# Altium PCB СФ МЭИ ЛБ ПЭ2-18 11.03.04 03.PcbDoc
Units mm, origin at the board's own origin, x right, y up, seen from the top; angles counter-clockwise.
Board outline 36.78 x 15.7 mm, 2 copper layers (Top Layer, Bottom Layer); 13 components, 7 nets, 31 pads, 2 vias.
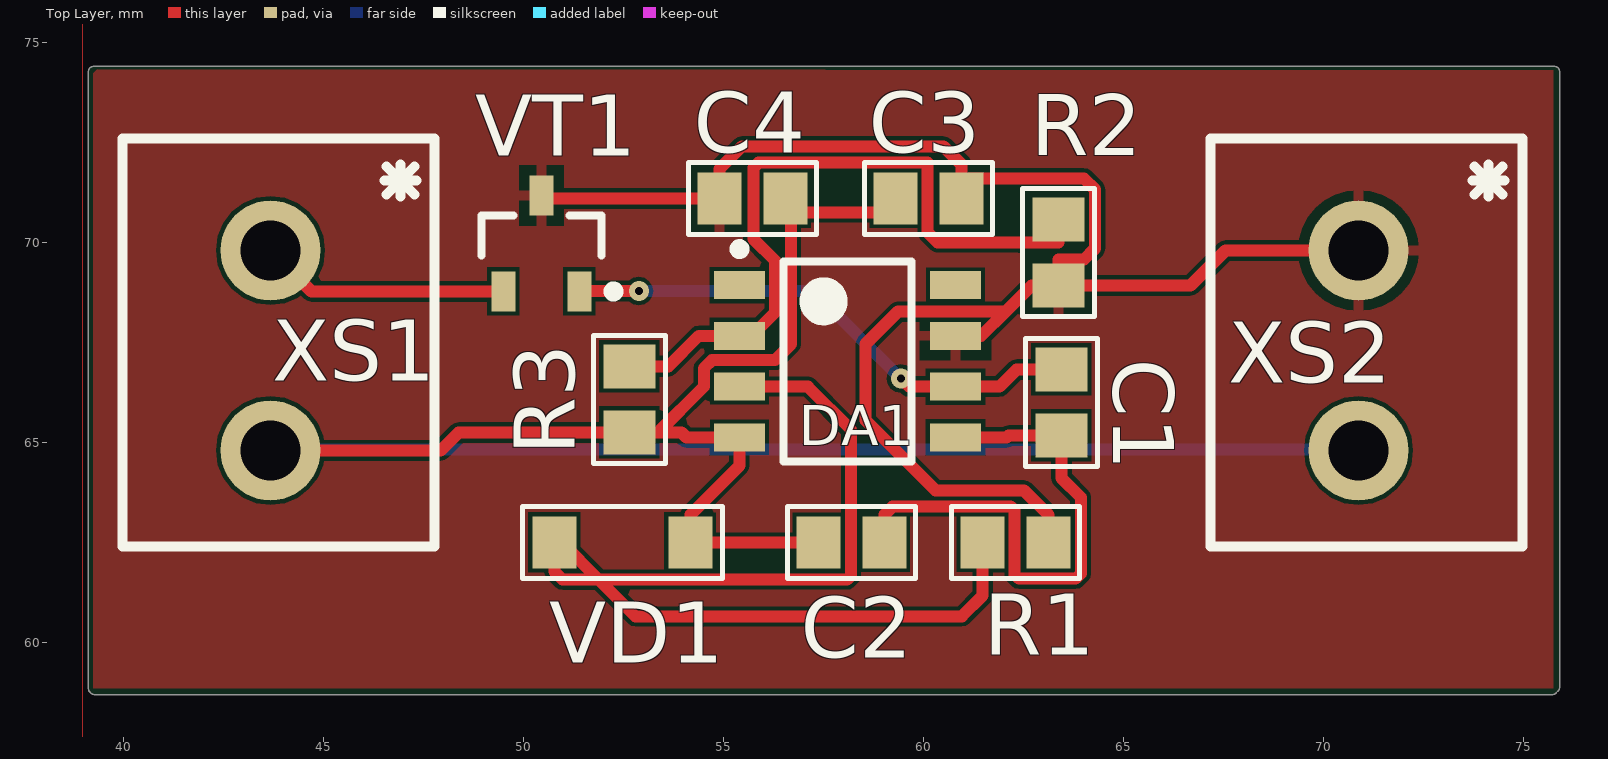
[diagram p0: Top Layer view]
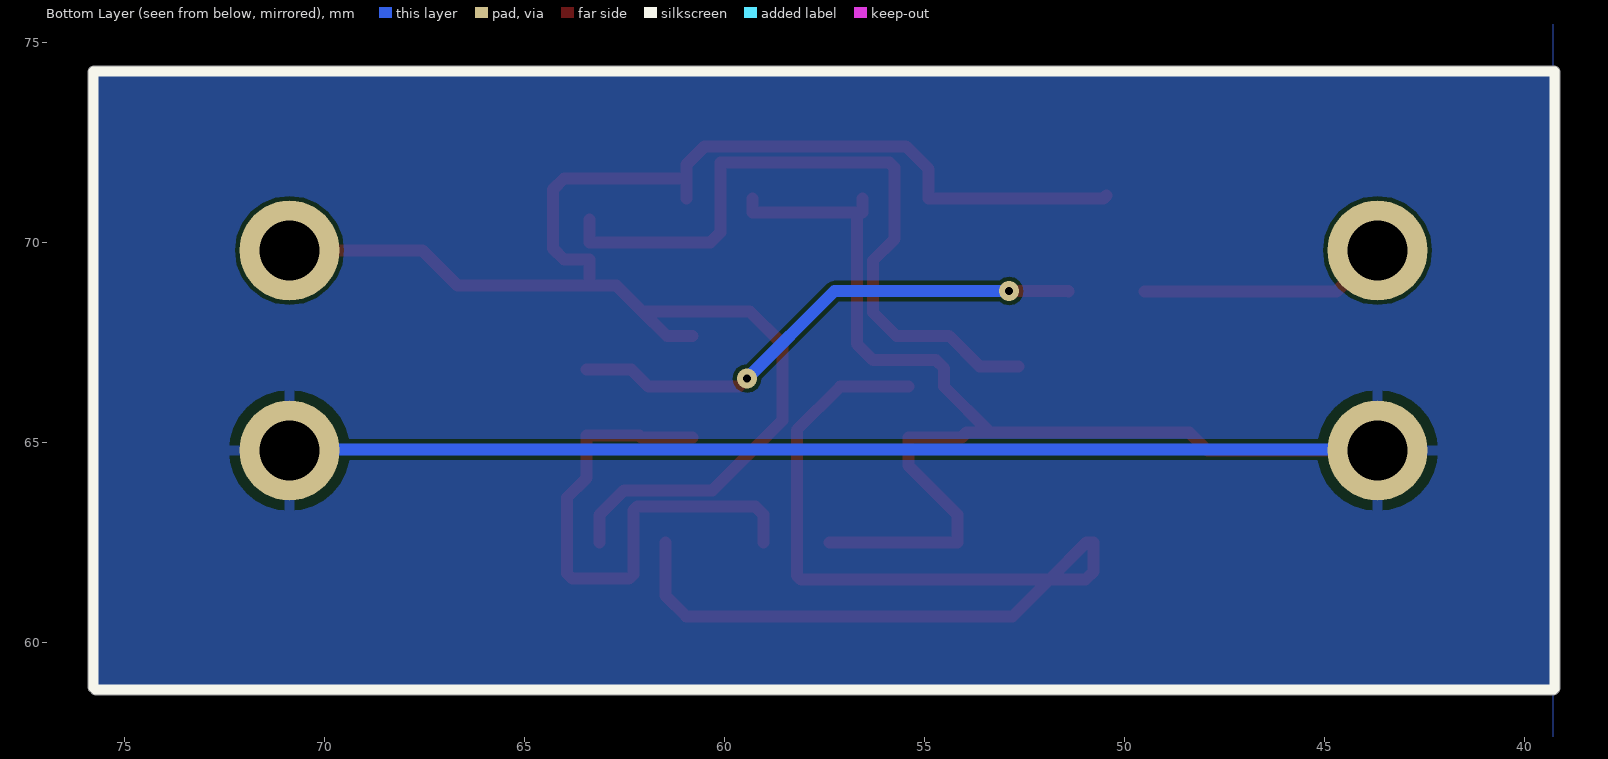
[diagram p1: Bottom Layer view, seen from below]
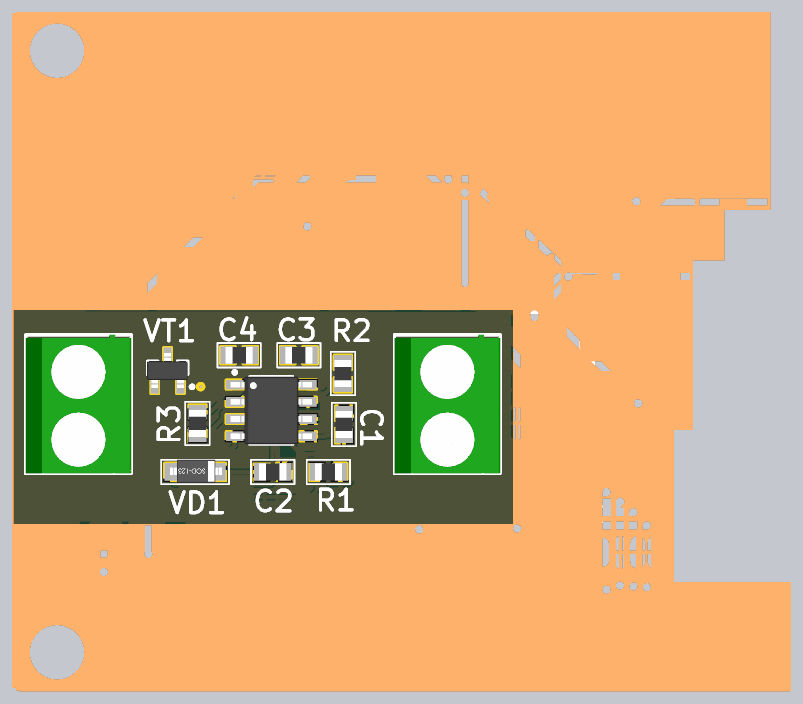
[diagram p2: 3D render of the assembled board from above, using the file's embedded part models]

## Layer stack, top to bottom
Top Solder: solder mask 0.0102, Solder Resist, Dk 3.5
Top Layer: signal copper 0.0356
Dielectric 1: dielectric 0.32, FR-4, Dk 4.8
Bottom Layer: signal copper 0.0356
Bottom Solder: solder mask 0.0102, Solder Resist, Dk 3.5

## Board outline
39.16,58.759 cw(c39.25,58.85) 39.123,58.85 39.123,74.275 cw(c39.25,74.275) 39.25,74.402 75.775,74.402 cw(c75.775,74.275) 75.902,74.275 75.902,58.875 cw(c75.775,58.875) 75.865,58.785 75.815,58.735 cw(c75.725,58.825) 75.725,58.698 39.275,58.698 cw(c39.275,58.825) 39.184,58.735 39.185,58.735

## Design rules (kind name [scope] priority, off if disabled: settings)
Clearance [All] p1: gap=0.1 ignorepadtopadclearanceinfootprint=FALSE except(0: Arc-Hole Track-Hole SMDPad-Hole THPad-Hole Via-Hole Fill-Hole Poly-Hole Region-Hole Text-Hole)
MinimumAnnularRing MinimumAnnularRing_1 [All] p1: minimumring=0.254
MinimumAnnularRing [All] p2: minimumring=0.254
PolygonConnect [All] p1: connectstyle=Relief reliefconductorwidth=0.254 reliefentries=4 polygonreliefangle="90 Angle" airgapwidth=0.254
RoutingVias [All] p1: holewidth=0.1 width=1.27 viastyle="Through Hole" minholewidth=0.2 minwidth=0.4 maxholewidth=0.2 maxwidth=0.4
SolderMaskExpansion [All] p1: expansion=0.102 istentingtop=FALSE
Width [All] p1: maxlimit=1 minlimit=0.1 preferedwidth=0.3
30 further rules are at their usual default settings.

## Classes and differential pairs
component class "Схема принципиальная": C1 C2 C3 C4 DA1 R1 R2 R3 VD1 VT1 XS1 XS2

## Components (designator, comment, footprint, x,y, rotation, side; value= is the part's Value field where it differs from the comment)
C1 "0.047u" 0805 63.45,66 r90 top
C2 "1000" 0805 58.2,62.5 r0 top
C3 "0.015u" 0805 60.125,71.1 r180 top
C4 "0.068u" 0805 55.725,71.1 r180 top
DA1 "КФ140УД18" SOIC-8 58.1,67.03 r0 top
R1 "300" 0805 62.3,62.5 r0 top
R2 "7,5k" 0805 63.375,69.75 r270 top
R3 "18k" 0805 52.65,66.075 r90 top
VD1 "MMSZ5235B" SOD-123 52.475,62.5 r180 top (schematic designator VD?)
VT1 "IRLML2402TRPBF" SOT23 50.45,69.975 r90 top
XS1 "XS 2 pin 220 B" DG126-5.0-02P 43.675,64.8 r0 top
XS2 "XS 2 pin 9v" DG126-5.0-02P 70.875,64.8 r0 top
ZBOAS194492846 "Comment" "BOASVIEWassembly:Вид спереди для сборочного:4:1:0:101" 49.4,2358.3 r0 top

## Footprints (in the part's own frame and the unit in brackets; to place one, negate y for a bottom-side part, rotate by r counter-clockwise, add the part's x,y. Pads: shape width x height; smd on the part's side, far side on the other; paste and mask are expansions set on the pad)
0805 [mm] "Чип (SMD)"
  rect 1.1x1.3 smd: 1(-0.825,0) 2(0.825,0)
  silkscreen extent -1.6,-0.9 1.6,0.9, body extent -1,-0.63 1,0.63, height 0.5
"BOASVIEWassembly:Вид спереди для сборочного:4:1:0:101" [mm]
DG126-5.0-02P [mm]
  round 2.5 hole 1.5: 1(0,5) 2(0,0)
  silkscreen extent -3.7,-2.4 4.1,7.8, body extent -3.7,-2.42 4.1,7.82, height 9.95
SOD-123 [mm] "(SMD)"
  rect 1.1x1.3 smd: 1(-1.7,0) 2(1.7,0)
  silkscreen extent -2.5,-0.9 2.5,0.9, body extent -2,-0.9 1.85,0.8, height 1.37
SOIC-8 [mm] "SOIC, 8-Leads, Body 4,90x3,90mm, Pitch 1,27mm, IPC Medium Density"
  rect 1.28x0.7 smd: 1(-2.7,1.905) 2(-2.7,0.635) 3(-2.7,-0.635) 4(-2.7,-1.905) 5(2.7,-1.905) 6(2.7,-0.635) 7(2.7,0.635) 8(2.7,1.905)
  silkscreen extent -2.82,-2.5 1.6,2.93, body extent -3,-2.5 3,2.5, height 1.75
SOT23 [mm] "SOT23, 3-Leads, Body 2,92x2,45mm, Pitch 0,95mm, IPC Medium Density"
  rect 1x0.6 smd: 1(-1.2,-0.95) 2(-1.2,0.95) 3(1.2,0)
  silkscreen extent -1.32,-1.92 0.7,1.5, body extent -1.3,-1.52 1.3,1.52, height 1.12

## Part data
C1: library part "К53-68\"R\"-25В-0.047 мкФ ±10% 0805_3", "К53-68\"R\"-25В-0.047 мкФ ±10%"
C2: library part "К53-68\"R\"-25В-1000 пФ ±10% 0805_2", "К53-68\"R\"-25В-1000 пФ ±10%"
C3: library part "К53-68\"R\"-25В-0.015 мкФ ±10% 0805_1", "К53-68\"R\"-25В-0.015 мкФ ±10%"
C4: library part "К53-68\"R\"-25В-0.068 мкФ ±10% 0805", "К53-68\"R\"-25В-0.068 мкФ ±10%"
DA1: "Операционный усилитель среднего класса точности с дифференциальным входом"
R1: library part "0.125Вт 0805 300 Ом, 5%, Чип резистор (SMD)", "0805-0.125 Вт -300 Ом±5%"
R2: library part "0.125Вт 0805 7,5 кОм, 5%, Чип резистор (SMD)", "0805-0.125 Вт -7,5 кОм±5%"
R3: library part "0.125Вт 0805 18 кОм, 5%, Чип резистор (SMD)", "0805-0.125 Вт -18 кОм±5%"
VD1: "Стабилитрон 6.8В 0.5Вт [SOD-123]"
VT1: "SI2304DDS-T1-GE3"

## Via types
v1: diameter 0.5, hole 0.2, Top Layer to Bottom Layer, 2 vias

## Nets (pads, with @x,y where several pads share a name; then routed paths per layer and width w, separated by ;. In a path a pad name is that pad's centre, name@x,y a point inside that pad or via, vN(x,y) a via of type N, cw(c..) or ccw(c..) an arc to the next point about the centre after c; other vN are vias at no path point)
GND: C2.1 C3.2 C4.1 DA1.4 R3.1 VD1.1 XS1.2 XS2.2 | length 56.8
  Top Layer w0.3: XS1.2 47.93,64.8 48.38,65.25 R3.1 53.363,65.25 ; C4.1 56.55,70.75 C4.1@56.693,70.75 ; C2.1 VD1.1 54.175,63.195 55.4,64.42 DA1.4 54.075,65.125 53.95,65.25 53.363,65.25 ; C3.2 59.3,70.75 C4.1@56.693,70.75 ; 53.363,65.25 54.508,66.396 54.508,66.853 54.712,67.056 56.286,67.056 56.693,67.462 C4.1@56.693,70.75
  Bottom Layer w0.3: XS1.2 43.696,64.821 70.854,64.821 XS2.2
NetC1_1: C1.1 C2.2 DA1.5 | length 13.7
  Top Layer w0.3: C2.2 59.025,63.195 59.23,63.4 62.179,63.4 62.281,63.298 62.281,61.697 62.382,61.595 63.805,61.595 63.932,61.722 63.932,63.627 63.45,64.109 C1.1 62.128,65.175 62.078,65.125 DA1.5
NetC1_2: C1.2 DA1.6 VT1.1 | length 13.2
  Top Layer w0.3: VT1.1 51.4,68.783 v1(52.883,68.783) ; v1(59.436,66.599) 59.64,66.395 DA1.6 61.9,66.395 62.33,66.825 C1.2
  Bottom Layer w0.3: v1(52.883,68.783) 57.252,68.783 v1(59.436,66.599)
NetC3_1: C3.1 C4.2 DA1.7 R1.2 R2.2 VT1.3 XS2.1 | length 42.1
  Top Layer w0.3: VT1.3 50.525,71.1 52.704,71.1 C4.2 54.9,71.842 55.458,72.4 60.5,72.4 60.95,71.95 C3.1@60.95,71.603 ; DA1.7 61.443,67.665 62.053,68.275 ; C3.1 C3.1@60.95,71.603 ; R1.2 63.125,63.189 62.514,63.8 60.304,63.8 58.551,65.553 58.551,67.462 59.364,68.275 62.053,68.275 ; XS2.1 67.55,69.8 66.675,68.925 R2.2 ; C3.1@60.95,71.603 64.008,71.603 64.287,71.323 64.287,69.85 64.008,69.571 63.375,69.571 R2.2 ; 62.053,68.275 62.703,68.925 R2.2
NetDA1_2: DA1.2 R2.1 R3.2 | length 18.1
  Top Layer w0.3: R3.2 53.619,66.9 54.384,67.665 DA1.2 55.702,67.665 56.29,68.253 56.29,69.545 55.75,70.085 55.75,71.87 55.88,72 60.1,72 60.1,70.253 60.35,70.002 63.375,70.002 R2.1
NetDA1_3: DA1.3 R1.1 VD1.2 | length 28.2
  Top Layer w0.3: DA1.3 57.11,66.395 58.191,65.314 58.191,61.671 58.09,61.57 51.883,61.57 ; R1.1 61.475,61.17 60.96,60.655 52.797,60.655 51.883,61.57 ; 51.883,61.57 50.978,61.57 50.775,61.773 VD1.2 50.952,62.5 51.883,61.57
NetVT1_2: VT1.2 XS1.1 | length 6.2
  Top Layer w0.3: XS1.1 44.7,68.775 VT1.2
pads on no net: DA1.1 DA1.8

## Polygon pours and split planes (outlines as drawn)
GND on Bottom Layer "GND_L02_P014" (solid, pour order 14): 39.25,74.325 39.25,58.85 75.725,58.85 75.75,58.825 75.75,74.3
no net on Bottom Layer "GND A" (solid, shelved, pour order 7): 39.275,46.375 39.275,96.4 142.075,96.4 142.075,46.375
NetC3_1 on Top Layer "NETC3_1_L01_P015" (solid, pour order 15): 39.25,74.325 39.25,58.85 75.725,58.85 75.75,58.825 75.75,74.3
no net on Top Layer "GND A" (solid, shelved, pour order 6): 38.981,46.316 38.981,96.341 141.781,96.341 141.781,46.316
no net on Top Overlay "NONET_L01_P-001" (solid): 39.325,73.95

## Silkscreen, mask and mechanical layers (free items; w line width, h text height)
Bottom Overlay:
  lines w0.254: 39.25,58.85 39.275,58.825 ; 39.25,58.85 39.25,74.275 75.775,74.275 75.775,58.875 75.725,58.825 39.275,58.825 ; 39.25,58.85 39.275,58.825
Mechanical 7:
  text "BOASFORMAT|А3|101|0|883070867|165354330|1000000000|4:1|" at 0,2540 h0
  text "DimPos|57431102|946407480|-11564961|-10413386|10|2286542" at 175.25,2430.325 h0
  text "DimPos|23228346|948080709|6811023|-8612204|2|1772217" at 41.7,2430 h0
  text "DimPos|43671260|948720472|8228347|-7844489|7|1416598" at 90.025,2429.675 h0
  text "DimPos|51387795|948208661|7204724|-8100394|5|1742827" at 112.225,2429.025 h0
  text "DimPos|73238189|940748031|-14271654|-12992126|2|1772217" at 222.275,2422.5 h0
  text "DimLitera|40049213|939192913|12805119|14389763|1|||1||0|0|False" at 69.2,2349 h0
  text "DimLitera|74438976|930442913|-10570867|6299212|1|||1||0|0|False" at 215.925,2347.325 h0
  text "DimPos|57559055|938690945|-14399606|14655512|6|1454805" at 182.775,2347.05 h0
  text "DimLitera|56269685|934576772|-5659449|11564961|1|||1||0|0|False" at 157.3,2344.45 h0
  text "DimPos|49714567|934064961|1801181|11702756|4|1178539" at 121.7,2342.8 h0
  text "DimPos|56259843|934458661|-7224409|12322834|9|1454805" at 161.25,2342.225 h0
  text "DimLitera|41377953|933887795|5767717|12125984|1|||3||0|0|False" at 90.45,2341.275 h0
  text "DimLitera|53307087|939458661|-2440944|20629921|1|||13||0|0|False" at 141.6,2333.825 h0
  text "DimPos|47933071|940442913|7627953|23661417|8|1584121" at 102.375,2328.625 h0
  text "SET2|Superlayer=MechanicalLayer7|Wsuperlayer=MechanicalLayer8|Layergrid=MechanicalLayer9|Werase=MechanicalLayer11|Layermark=MechanicalLayer12|Layerstamp=MechanicalLayer13|Thinline=0,18|Basicline=0,6|Gridline=0,18|Boardline=0,6|Contourpolygonline=0,6|PcbGridStep=1,25|PcbGridCleareanceAtView=0|PcbGridNumberEach=l4|PcbGridLineEach=l2|PcbGridCountSecondaryStrip=1|PcbGridEnabledStrip=True|PcbSignalGridEnabled=True|PcbSignalShowBukva=True|RealSignalLayerNames=False|PcbGridEnabledBothSide=False|RealLayerNames=False|SilkShowPad=True|SilkViewName=Слой маркировки|SilkShowHole=True|SilkShowAxis=True|SilkShowBukva=True|SilkShowGrid=False|SolderShowGrid=False|SolderViewName=Слой маски|SolderShowAxis=False|SolderShowBukva=False|MainViewShowGrid=False|MainViewUseShapesDrill=False|ShowBukvaOnSboky=True|Density=2,2|TableName=Таблица 1|RazrezWidth=100|Sher=Rz 160|Asstoplayer=TopOverlay|Asstoplayer2=MechanicalLayer15|Assbottomlayer=MechanicalLayer2|Assbottomlayer2=MechanicalLayer15|AssMinDiameterHoles=2|AssDim=False|AssMech=True|AssSilk=False|AssComponentSilk=False|AssFreeSilk=False|AssSmdPads=False|AssGridEnable=False|Mirror=Horisontal|PcbGridFontSize=5|PcbGridCenterZero=False|TTStampDistance=12|MainFontSize=5|PolyStep=2|PcbDrillDrawingGridEnabled=False|PcbDrillDrawingViewName=Слой сверловки|PcbDrillDrawingShowBukva=False|PcbDrillDrawingShowAxis=False|PcbSignalLayersUseDrill=False|PcbSignalLayersUseShapesDrill=False|PcbSignalLayersShowAxis=False" at 0,0.025 h0
  text "2TT0008# 9.Радиатор прикрепить при помощи клей теплопроводный Радиал" at 0,0 h0
  text "2TT0007#  8 Клеймить." at 0,0 h0
  text "2TT0006#  7 Маркировать обозначение и заводской номер печатного узла черной краской МКЭ ОСТ 4ГО.054.2050М2 шрифтом 3,5 или 5 тип А ГОСТ 2.304-81, вместе, удобном для чтения." at 0,0 h0
  text "2TT0005#  6 Покрытие лак УР-231 ТУ6-21-14-90(3). Допускается покрытие лаком ЭП-730 ГОСТ 20824-81(3)." at 0,0 h0
  text "2TT0004#  5 Элементы поверхностного монтажа паять припойной пастой ПОС-61 ЛОК ТУ 400 К''Р''-1805-22-91, флюс ФПС-3 ТУ400 СП \"ЭВ\"-2178-137-98." at 0,0 h0
  text "2TT0003#  4 Меры защиты от статического электричества по ОСТ 92-1615-74. Степень жесткости II по ОСТ11.073.062-2001." at 0,0 h0
  text "2TT0002#  3** Размеры обеспеч. инстр." at 0,0 h0
  text "2TT0001#  2* Размеры для справок." at 0,0 h0
  text "2TT0000#  1 Установку элементов производить по чертежу." at 0,0 h0
  text "TT0005#" at 0,0 h0
  text "TT0004#  5 Конфигурацию печатных проводников выдерживать по координатной сетке с отклонениями от чертежа ±1,5 мм." at 0,0 h0
  text "TT0003#  4 Шаг координатной сетки 1,25 мм. Линии сетки нанесены через одну." at 0,0 h0
  text "TT0002#  3 Печатная плата должна соответствовать ГОСТ Р 53429-2009, группе жесткости 3 при верхнем значении температуры окружающей среды (85±2) °С." at 0,0 h0
  text "TT0001#  2 Класс точности 3 по ГОСТ Р 53429-2009." at 0,0 h0
  text "TT0000#  1 *  Размер для справок." at 0,0 h0
  text "STAMP|Наименование1|Стабилизатор" at 0,0 h0
  text "STAMP|Наименование2|напряжения" at 0,0 h0
  text "STAMP|Обозначение|СФ МЭИ ЛБ ПЭ2-18 11.03.04 03" at 0,0 h0
  text "STAMP|Масса|120 г" at 0,0 h0
  text "STAMP|Разработал|Гончаренко В.Ю." at 0,0 h0
  text "STAMP|Проверил|Смолин В.А." at 0,0 h0
  text "STAMP|Утвердил|Рассказа Д.С." at 0,0 h0
  text "STAMP|Var|Нач. отд." at 0,0 h0
  text "STAMP|Tech|Т.контр." at 0,0 h0
  text "STAMP|Normo|Н.контр." at 0,0 h0
  text "STAMP|Check|Пров." at 0,0 h0
  text "STAMP|Design|Разраб." at 0,0 h0
  text "STAMP|Utv|Утв." at 0,0 h0
  text "STAMP|Первичная применяемость|СФ МЭИ ЛБ ПЭ2-18 11.03.04 03" at 0,0 h0
  text "STAMP|Организация|НИУ СФ МЭИ ПЭ2-18" at 0,0 h0
  text "2STAMP|Организация|НИУ СФ МЭИ ПЭ2-18" at 0,0 h0
  text "2STAMP|Масса|120 г" at 0,0 h0
  text "2STAMP|Первичная применяемость|СФ МЭИ ЛБ ПЭ2-18 11.03.04 03" at 0,0 h0
  text "2STAMP|Наименование1|Стабилизатор" at 0,0 h0
  text "2STAMP|ТипДокумента|Сборочный чертёж" at 0,0 h0
  text "2STAMP|Наименование2|напряжения" at 0,0 h0
  text "2STAMP|Разработал|Гончаренко В.Ю." at 0,0 h0
  text "2STAMP|Проверил|Смолин В.А." at 0,0 h0
  text "2STAMP|Утвердил|Рассказа Д.С." at 0,0 h0
  text "2STAMP|Var|Нач. отд." at 0,0 h0
  text "2STAMP|Tech|Т.контр." at 0,0 h0
  text "2STAMP|Normo|Н.контр." at 0,0 h0
  text "2STAMP|Check|Пров." at 0,0 h0
  text "2STAMP|Design|Разраб." at 0,0 h0
  text "2STAMP|Utv|Утв." at 0,0 h0
  text "2STAMP|Обозначение|СФ МЭИ ЛБ ПЭ2-18 11.03.04 03 СБ" at 0,0 h0
  text "BOASVIADRILLTABLE:bigquare,78740,2," at 0,0 h0
  text "2BOASDRILLTABLE:triangle,590551,Да,4,True," at 0,0 h0
Mechanical 9:
  circle w0.6: c135.4,2386.225 r0.2
  circle w0.6: c121.75,2388.725 r0.2
  circle w0.6: c105.1,2372.075 r0.2
  circle w0.6: c101.725,2385.55 r0.2
  circle w0.6: c142.9,2373.525 r0.2
  circle w0.6: c189.075,2363.325 r0.2
  circle w0.6: c126.275,2372.525 r0.2
  circle w0.6: c146.2,2384.275 r0.2
  circle w0.6: c142.925,2373.825 r0.2
  circle w0.6: c59,2408.125 r0.2
  circle w0.6: c110.925,2409.75 r0.2
  circle w0.6: c130.525,2408.45 r0.2
  circle w0.6: c145.875,2403.875 r0.2
  circle w0.6: c186.025,2389.5 r0.2
  lines w0.18: 32.199,2430 41.7,2430 59,2408.125 ; 62.553,2349 69.2,2349 101.725,2385.55 ; 81.427,2429.675 90.025,2429.675 110.925,2409.75 ; 82.662,2341.275 90.45,2341.275 105.1,2372.075 ; 93.351,2328.625 102.375,2328.625 121.75,2388.725 ; 102.798,2429.025 112.225,2429.025 130.525,2408.45 ; 113.707,2342.8 121.7,2342.8 126.275,2372.525 ; 135.4,2386.225 141.6,2333.825 150.289,2333.825 ; 142.9,2373.525 161.25,2342.225 169.945,2342.225 ; 145.875,2403.875 175.25,2430.325 186.058,2430.325 ; 146.2,2384.275 182.775,2347.05 191.47,2347.05 ; 186.025,2389.5 222.275,2422.5 231.776,2422.5 ; 189.075,2363.325 215.925,2347.325 222.572,2347.325
  text "10" at 177.75,2432.855 h10.75
  text "2" at 34.699,2432.53 h10.75
  text "7" at 83.927,2432.205 h10.75
  text "5" at 105.298,2431.555 h10.75
  text "2" at 224.775,2425.03 h10.75
  text "1" at 65.053,2351.53 h7.68
  text "1" at 218.425,2349.855 h7.68
  text "6" at 185.275,2349.58 h10.75
  text "4" at 116.207,2345.33 h10.75
  text "9" at 163.75,2344.755 h10.75
  text "3" at 85.162,2343.805 h7.68
  text "13" at 144.1,2336.355 h7.68
  text "8" at 95.851,2331.155 h10.75
Mechanical 13:
  lines w0.18: 230,2253 295,2253 ; 230,2258 295,2258 ; 230,2263 295,2263 ; 230,2268 295,2268 ; 230,2273 295,2273 ; 230,2288 295,2288 ; 230,2293 295,2293 ; 230,2298 295,2298 ; 369.96,2268 369.96,2283 ; 374.98,2268 374.98,2283
  lines w0.6: 8,2273 20,2273 ; 8,2308 20,2308 ; 8,2333 20,2333 ; 8,2358 20,2358 ; 8,2475 20,2475 ; 13,2248 13,2393 ; 13,2415 13,2535 ; 20,2393 8,2393 8,2248 20,2248 ; 20,2415 8,2415 8,2535 20,2535 ; 20,2521 90,2521 90,2535 ; 230,2248 230,2303 415,2303 ; 230,2278 295,2278 ; 230,2283 295,2283 ; 237,2278 237,2303 ; 247,2248 247,2303 ; 270,2248 270,2303 ; 285,2248 285,2303 ; 295,2248 295,2303 415,2303 ; 295,2263 365,2263 415,2263 ; 295,2288 415,2288 ; 365,2248 365,2288 ; 365,2268 415,2268 ; 365,2283 380,2283 415,2283 ; 380,2268 380,2288 ; 385.57,2263 385.57,2268 ; 397,2268 397,2288 ; 415,2311 415,2303 ; 20,2248 415,2248 415,2535 20,2535 ; 20,2248 20,2535
  text "СФ МЭИ ЛБ ПЭ2-18 11.03.04 03 СБ" at 89.503,2530.018 h7.35 r180
  text "Перв. примен." at 11.976,2494.373 h5.38 r90
  text "СФ МЭИ ЛБ ПЭ2-18 11.03.04 03" at 17.976,2481.911 h5.38 r90
  text "Справ. №" at 11.976,2437.78 h5.38 r90
  text "Подп. и дата" at 11.976,2365.961 h5.38 r90
  text "Инв. № дубл." at 11.976,2336.457 h5.38 r90
  text "1 Установку элементов производить по чертежу. /   2* Размеры для справок. /   3** Размеры обеспеч. инстр. /   4 Меры защиты от статического электричества по ОСТ 92-1615-74. Степень жесткости II по ОСТ11.073.062-2001. /   5 Элементы поверхностного монтажа паять припойной пастой ПОС-61 ЛОК ТУ 400 К''Р''-1805-22-91, флюс ФПС-3 ТУ400 СП \"ЭВ\"-2178-137-98.  /   6 Покрытие лак УР-231 ТУ6-21-14-90(3). Допускается покрытие лаком ЭП-730 ГОСТ 20824-81(3). /   7 Маркировать обозначение и заводской номер печатного узла черной краской МКЭ ОСТ 4ГО.054.2050М2 шрифтом 3,5 или 5 тип А ГОСТ 2.304-81, вместе, удобном для чтения. /   8 Клеймить. /  9.Радиатор прикрепить при помощи клей теплопроводный Радиал" at 235,2323 h7.68
  text "Взам. инв. №" at 11.976,2311.496 h5.38 r90
  text "СФ МЭИ ЛБ ПЭ2-18 11.03.04 03 СБ" at 318.951,2293.391 h7.68
  text "Лит." at 369.328,2284.024 h5.38
  text "Масса" at 384.108,2284.024 h5.38
  text "Масштаб" at 399.133,2284.024 h5.38
  text "Подп. и дата" at 11.976,2282.461 h5.38 r90
  text "Стабилизатор" at 314.675,2280.891 h7.68
  text "Изм." at 230.687,2279.024 h5.38
  text "Лист" at 238.024,2279.024 h5.38
  text "№ докум." at 252.271,2279.024 h5.38
  text "Подп." at 273.92,2279.024 h5.38
  text "Дата" at 285.963,2279.024 h5.38
  text "Разраб." at 230.533,2273.771 h5.38
  text "Гончаренко В.Ю." at 247.68,2273.771 h5.14
  text "120 г" at 383.233,2273.391 h7.68
  text "4:1" at 403.065,2273.391 h7.68
  text "напряжения" at 317.479,2272.891 h7.68
  text "Пров." at 230.533,2268.771 h5.38
  text "Смолин В.А." at 247.68,2268.771 h5.38
  text "Сборочный чертёж" at 316.094,2265.524 h5.38
  text "Т.контр." at 230.533,2263.771 h5.38
  text "Лист" at 366.442,2263.771 h5.38
  text "Листов" at 387.485,2263.771 h5.38
  text "1" at 407.424,2263.771 h5.38
  text "Нач. отд." at 230.533,2258.771 h5.38
  text "Н.контр." at 230.533,2253.771 h5.38
  text "НИУ СФ МЭИ ПЭ2-18" at 368.285,2253.391 h7.68
  text "Инв. № подл." at 11.976,2251.457 h5.38 r90
  text "Утв." at 230.533,2248.771 h5.38
  text "Рассказа Д.С." at 247.68,2248.771 h5.38
  text "Копировал" at 305.533,2243.771 h5.38
  text "Формат А3" at 386.625,2243.771 h5.38

## Dimensions
75.725,58.825 to 75.775,74.275 on Bottom Overlay
39.275,58.825 to 75.725,58.825 on Bottom Overlay

## Text inside footprints (layer, text, board x,y; h text height)
ZBOAS194492846: Mechanical 12 "R3" at 98.057,2382.231 h6.1 r90; Mechanical 12 "C1" at 151.863,2391.872 h6.1 r270; Mechanical 12 "DA1" at 120.444,2383.21 h4; Mechanical 12 "VT1" at 88.1,2412.163 h6.1; Mechanical 12 "C2" at 120.631,2361.962 h6.1; Mechanical 12 "XS2" at 163.384,2389.463 h6.1; Mechanical 12 "C3" at 127.431,2412.463 h6.1; Mechanical 12 "R2" at 143.63,2412.223 h6.1; Mechanical 12 "R1" at 138.947,2362.263 h6.1; Mechanical 12 "C4" at 109.931,2412.463 h6.1; Mechanical 12 "VD1" at 95.5,2361.463 h6.1; Mechanical 12 "XS1" at 67.8,2389.663 h6.1